# Altium PCB PCB1.pcbdoc (part 1 of 3)
Units mil, origin at the board's own origin, x right, y up, seen from the top; angles counter-clockwise.
Board outline 4471.89 x 4515.94 mil, 4 copper layers (Top Layer, Inner1, Inner2, Bottom Layer); 115 components, 147 nets, 637 pads, 517 vias.
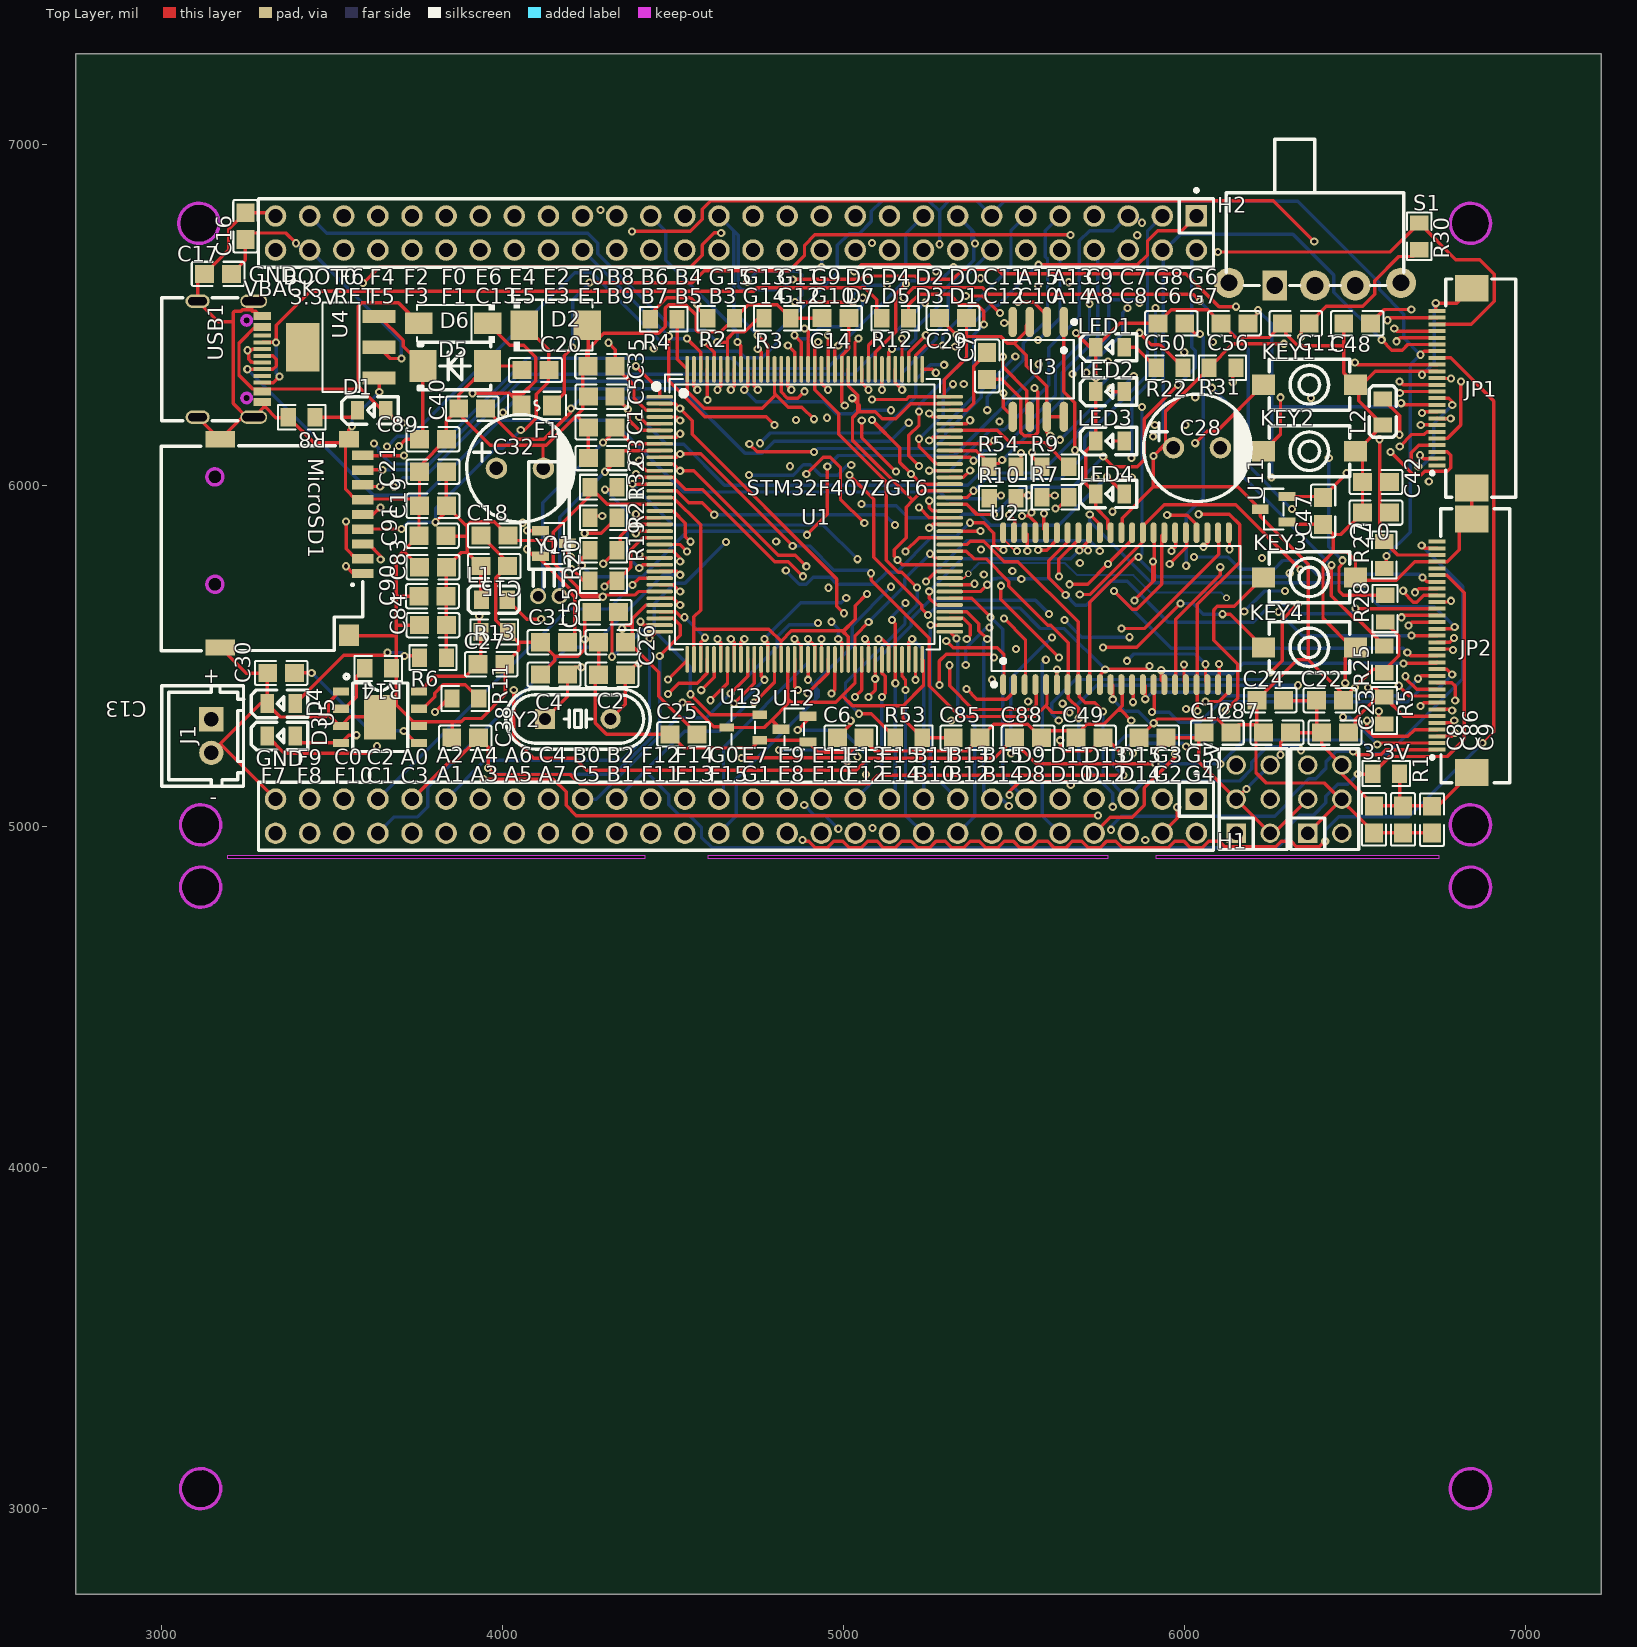
[diagram p0: Top Layer view]
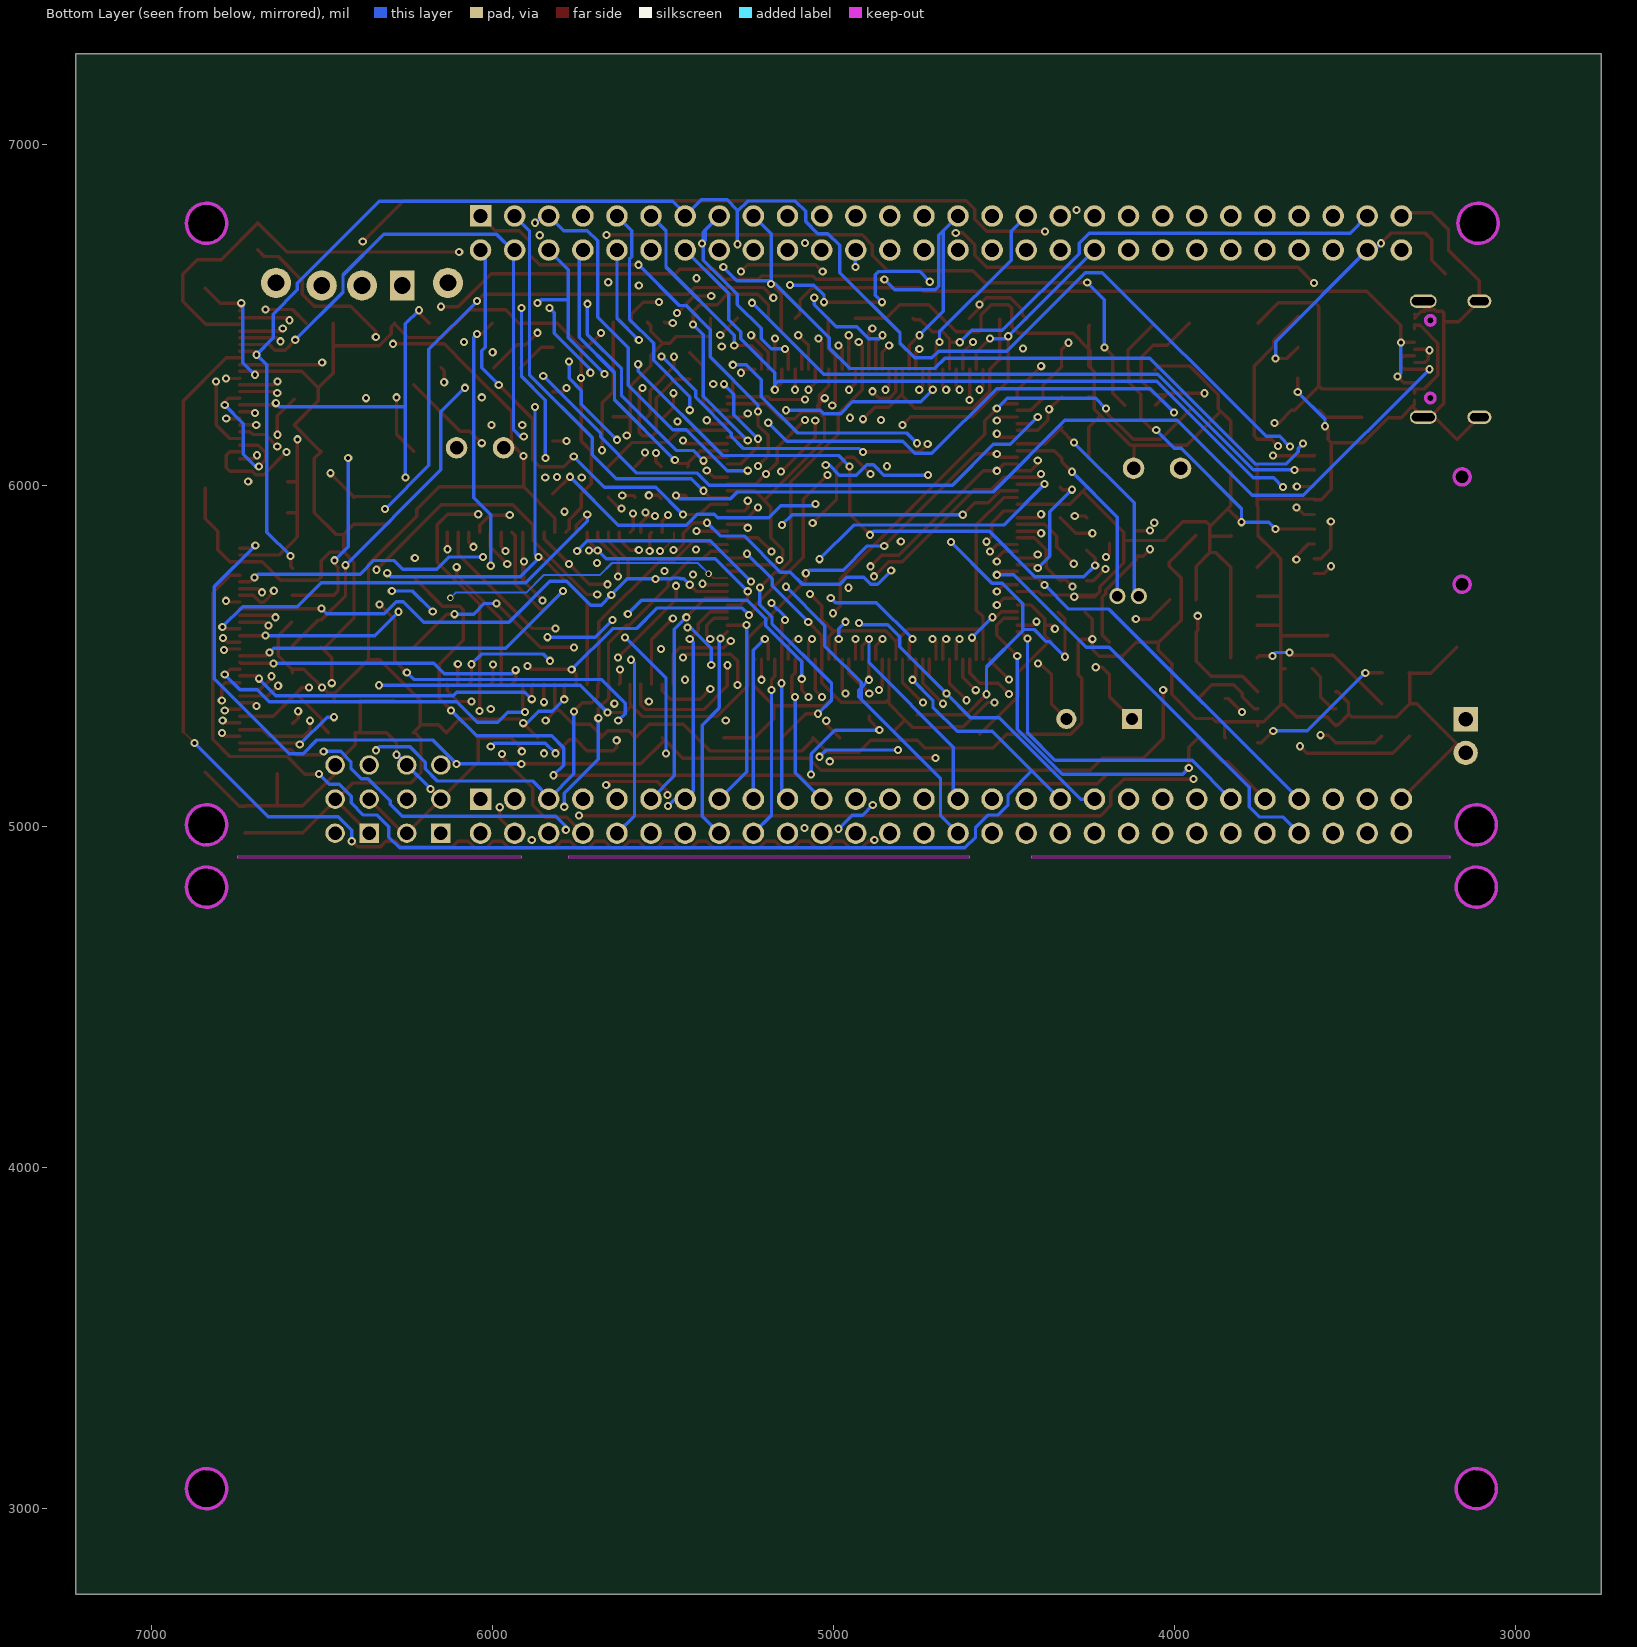
[diagram p1: Bottom Layer view, seen from below]
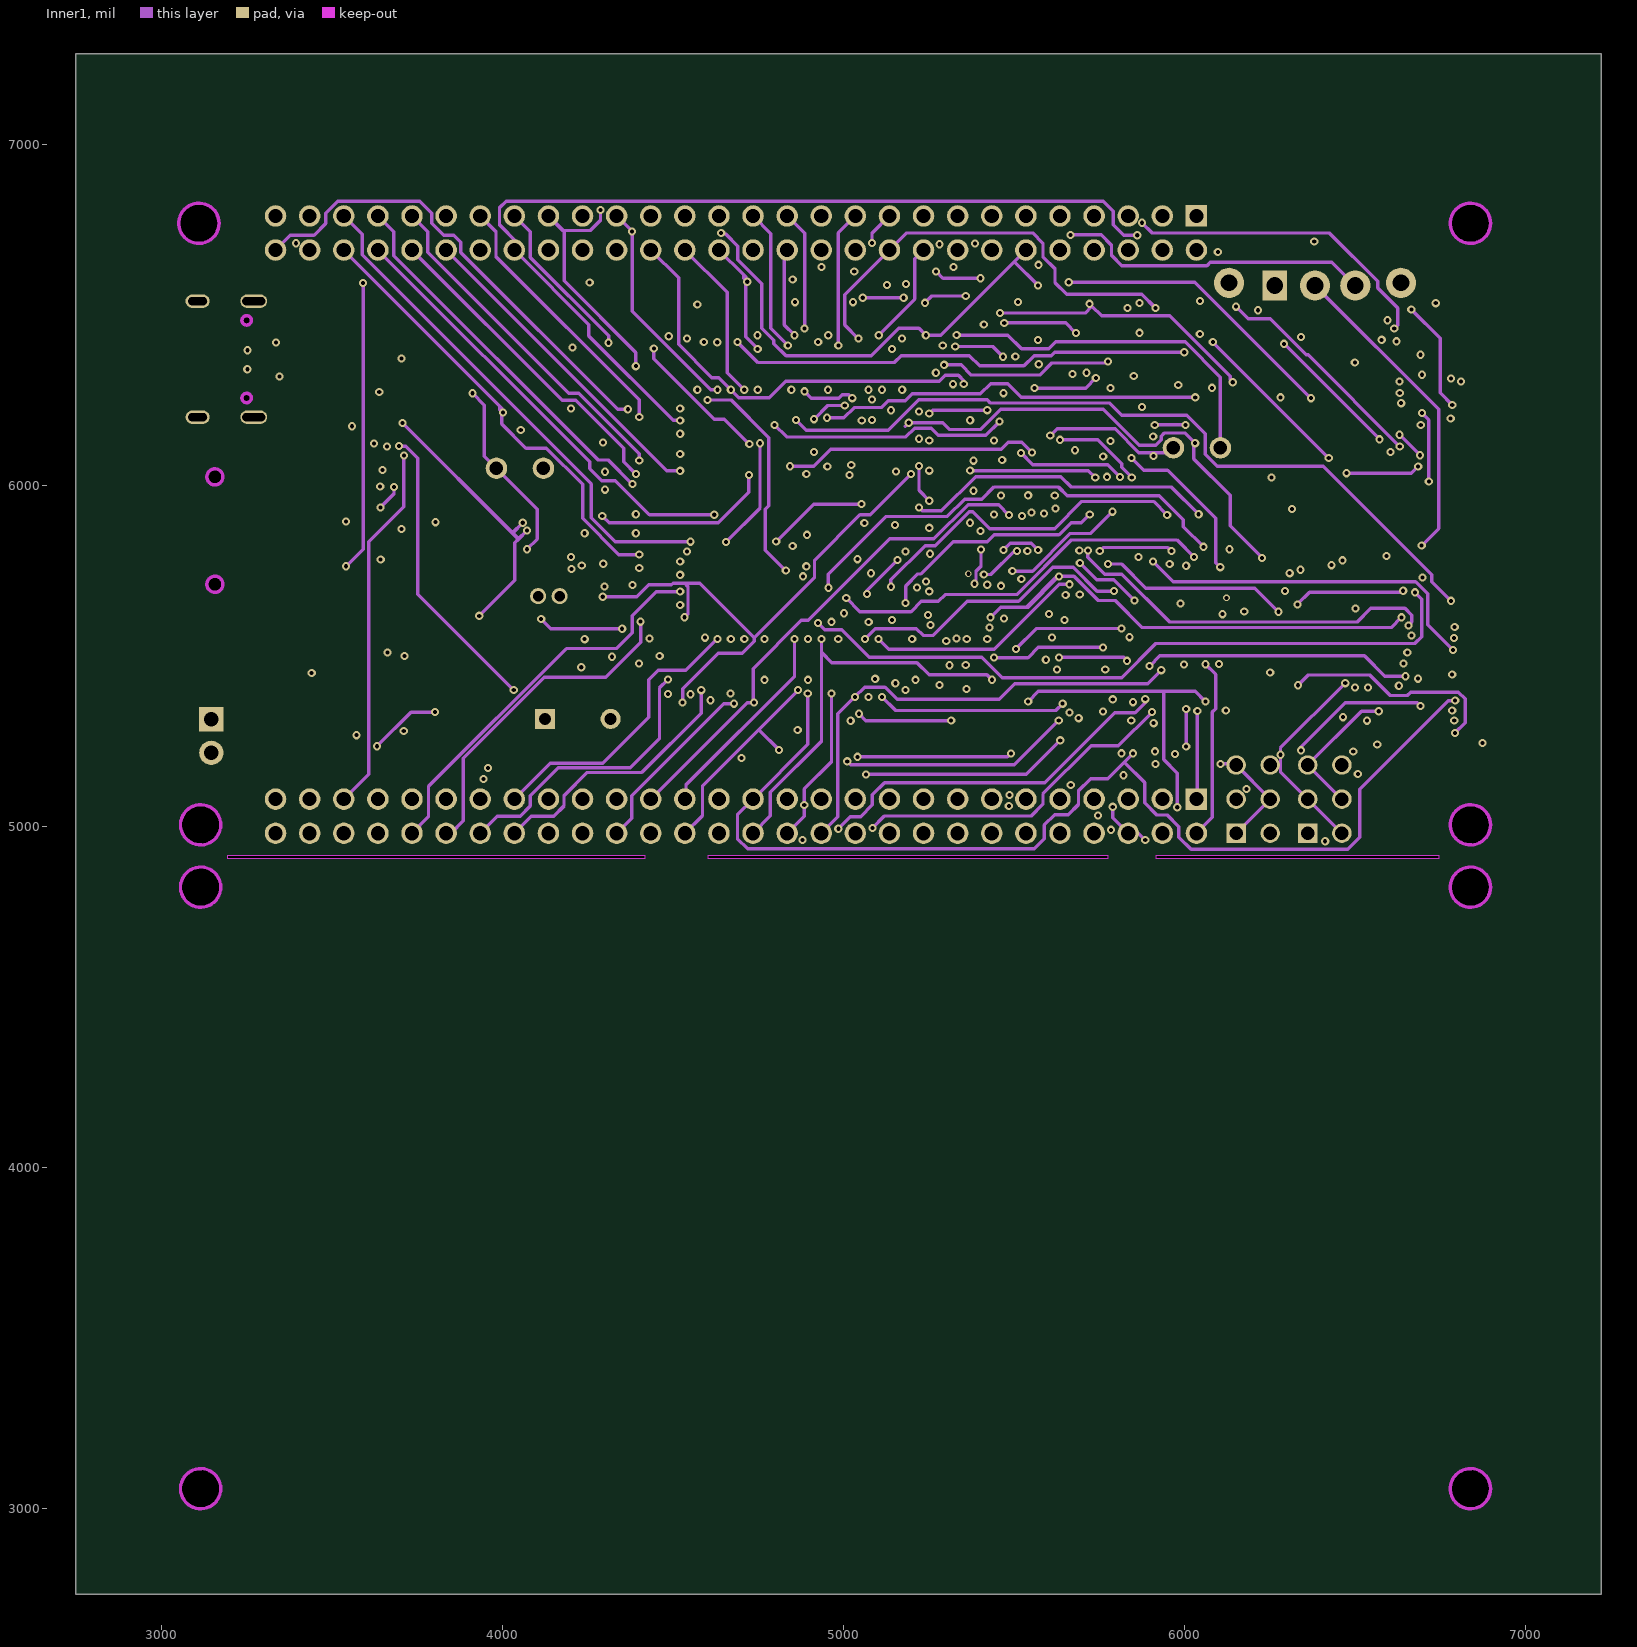
[diagram p2: Inner1]
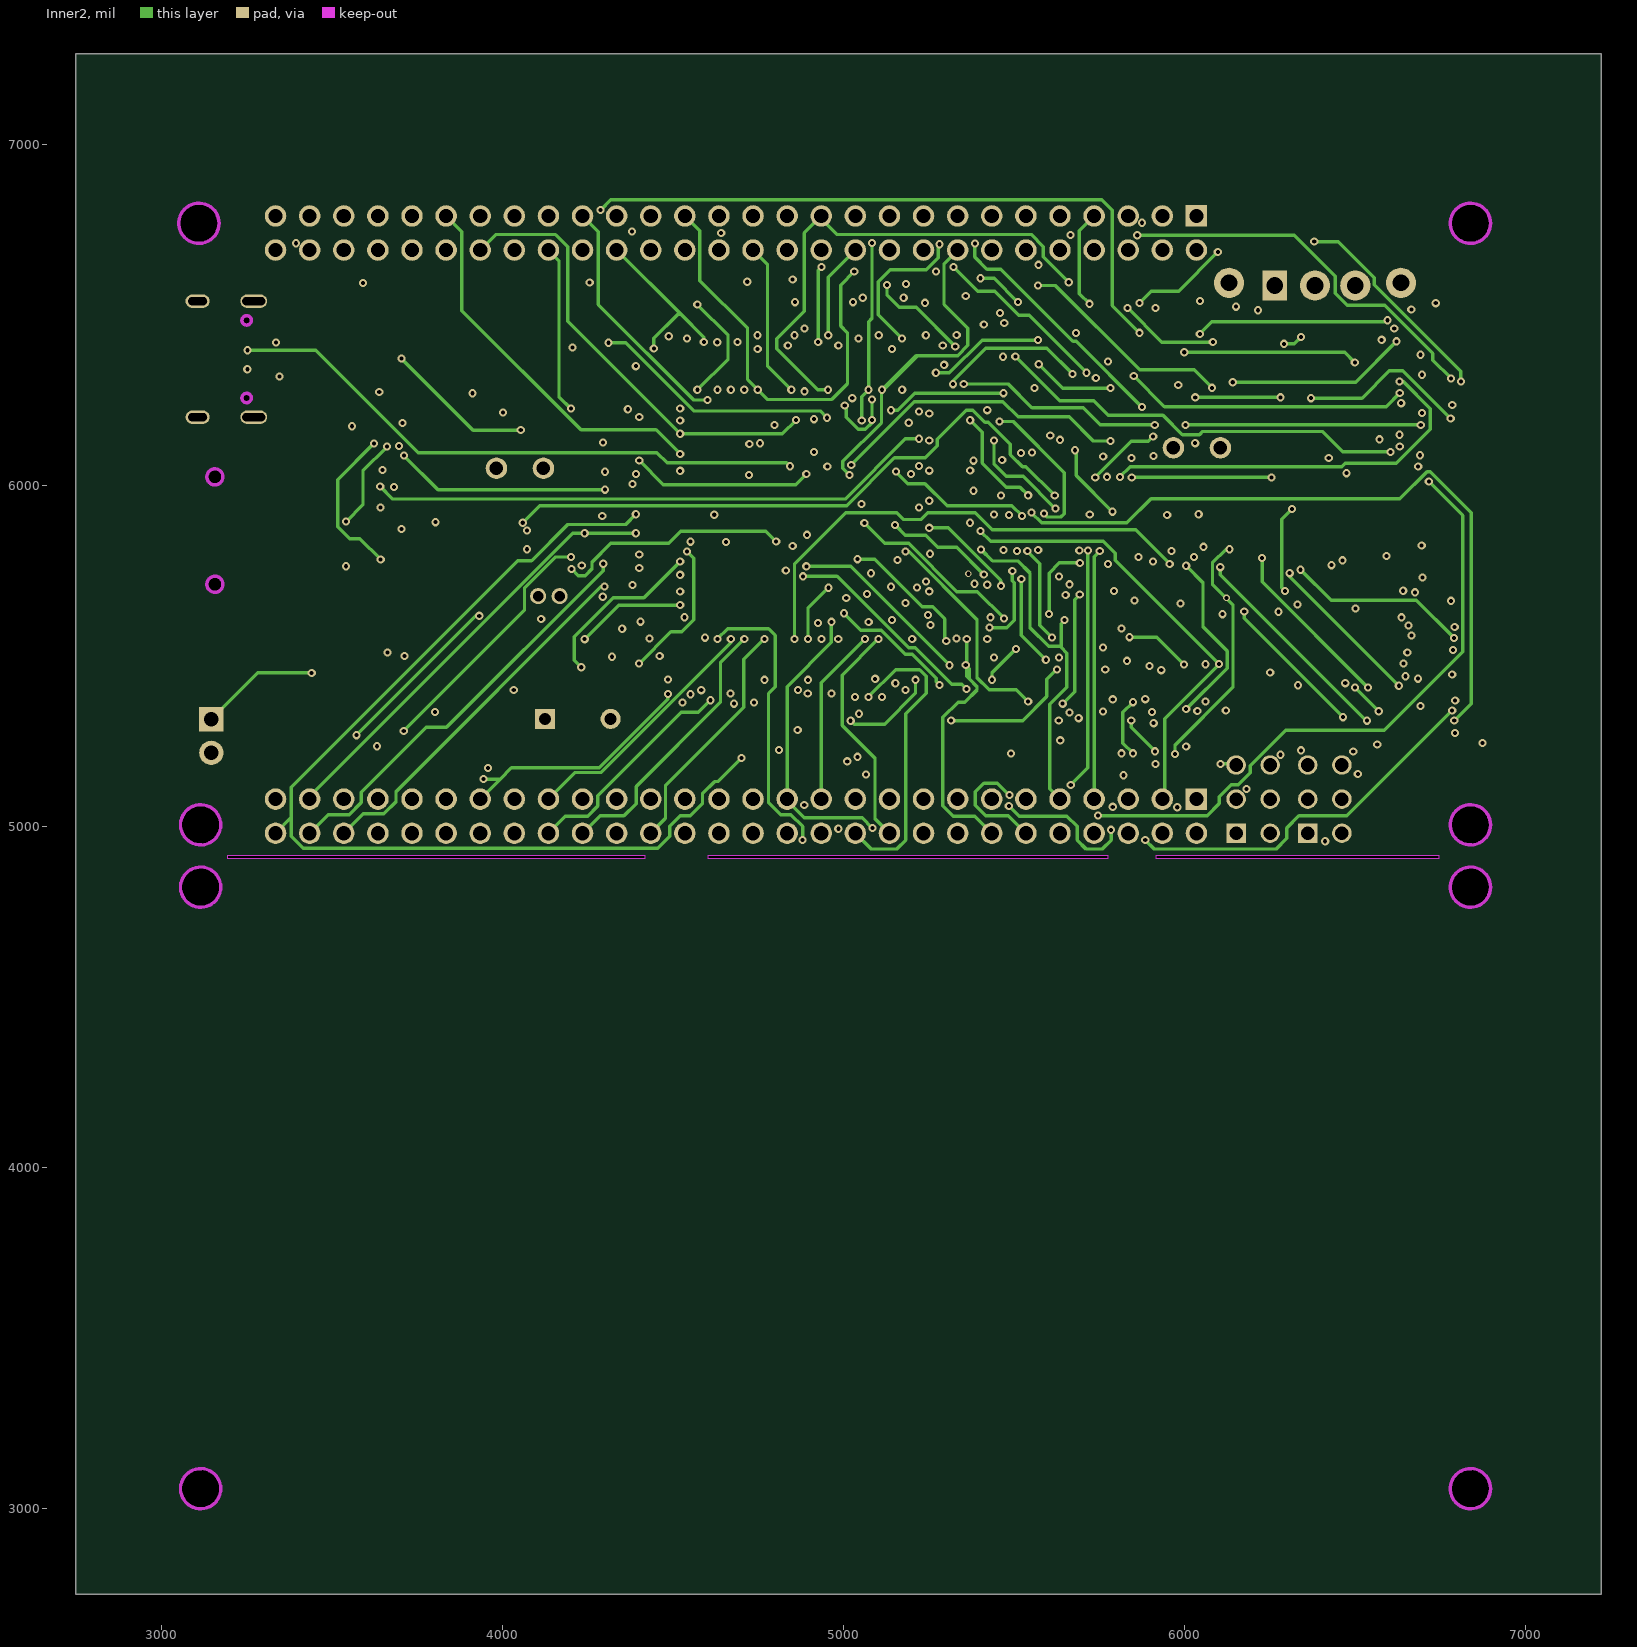
[diagram p3: Inner2]

## Layer stack, top to bottom
Top Layer: signal copper (thickness not stored)
Dielectric: dielectric 12.6, FR-4, Dk 4.8
Inner1: signal copper (thickness not stored)
Dielectric: dielectric 12.6, FR-4, Dk 4.8
Inner2: signal copper (thickness not stored)
Dielectric: dielectric 12.6, FR-4, Dk 4.8
Bottom Layer: signal copper (thickness not stored)

## Board outline
7221.89,2750 2750,2750 2750,7265.94 7221.89,7265.94
cut-out: 3169.69,6769.33 ccw(c3110.63,6768.85) 3051.58,6769.33 ccw(c3110.63,6769.81)
cut-out: 6898.03,6769.33 ccw(c6838.98,6769.33) 6779.92,6769.33 ccw(c6838.98,6769.33)
cut-out: 3174.69,5005.55 ccw(c3115.63,5005.07) 3056.58,5005.55 ccw(c3115.63,5006.03)
cut-out: 6898.03,5005.55 ccw(c6838.98,5005.55) 6779.92,5005.55 ccw(c6838.98,5005.55)
cut-out: 3174.69,3059.06 ccw(c3115.63,3058.58) 3056.58,3059.06 ccw(c3115.63,3059.54)
cut-out: 3174.69,4822.83 ccw(c3115.63,4822.35) 3056.58,4822.83 ccw(c3115.63,4823.31)
cut-out: 6898.03,4822.83 ccw(c6838.98,4822.83) 6779.92,4822.83 ccw(c6838.98,4822.83)
cut-out: 6898.03,3059.06 ccw(c6838.98,3059.06) 6779.92,3059.06 ccw(c6838.98,3059.06)
cut-out: 4418.76,4907.13 4418.76,4915 3193.92,4915 3193.92,4907.13
cut-out: 5776.71,4907.13 5776.71,4915 4601.87,4915 4601.87,4907.13
cut-out: 6747.82,4907.13 6747.82,4915 5916.67,4915 5916.67,4907.13

## Design rules (kind name [scope] priority, off if disabled: settings)
Clearance copperThickness1oz [All] p1: gap=7 ignorepadtopadclearanceinfootprint=FALSE except(4: Track-Track; 6: Track-SMDPad SMDPad-SMDPad Track-THPad SMDPad-THPad THPad-THPad Track-Via SMDPad-Via THPad-Via Via-Via Track-Fill SMDPad-Fill THPad-Fill Via-Fill Fill-Fill SMDPad-Region THPad-Region Via-Region Fill-Region Region-Region Track-Poly SMDPad-Poly THPad-Poly Via-Poly Fill-Poly Poly-Poly Track-Text SMDPad-Text THPad-Text Via-Text Fill-Text Region-Text Poly-Text Text-Text; 6.9: Track-Hole SMDPad-Hole THPad-Hole Via-Hole Fill-Hole Region-Hole Poly-Hole Text-Hole Sheet-Hole; 11.8: Track-Region Region-Poly Track-Sheet SMDPad-Sheet THPad-Sheet Via-Sheet Fill-Sheet Region-Sheet Poly-Sheet Text-Sheet)
Clearance copperThickness2oz [All] p1: gap=7 ignorepadtopadclearanceinfootprint=FALSE except(6: Track-SMDPad SMDPad-SMDPad Track-THPad SMDPad-THPad THPad-THPad Track-Via SMDPad-Via THPad-Via Via-Via Track-Fill SMDPad-Fill THPad-Fill Via-Fill Fill-Fill SMDPad-Region THPad-Region Via-Region Fill-Region Region-Region Track-Poly SMDPad-Poly THPad-Poly Via-Poly Fill-Poly Poly-Poly Track-Text SMDPad-Text THPad-Text Via-Text Fill-Text Region-Text Poly-Text Text-Text; 6.9: Track-Hole SMDPad-Hole THPad-Hole Via-Hole Fill-Hole Region-Hole Poly-Hole Text-Hole Sheet-Hole; 8: Track-Track; 11.8: Track-Region Region-Poly Track-Sheet SMDPad-Sheet THPad-Sheet Via-Sheet Fill-Sheet Region-Sheet Poly-Sheet Text-Sheet)
Clearance copperThicknessInner0.5oz [All] p1: gap=7 ignorepadtopadclearanceinfootprint=FALSE except(3.5: Track-Track; 6: Track-SMDPad SMDPad-SMDPad Track-THPad SMDPad-THPad THPad-THPad Track-Via SMDPad-Via THPad-Via Via-Via Track-Fill SMDPad-Fill THPad-Fill Via-Fill Fill-Fill SMDPad-Region THPad-Region Via-Region Fill-Region Region-Region Track-Poly SMDPad-Poly THPad-Poly Via-Poly Fill-Poly Poly-Poly Track-Text SMDPad-Text THPad-Text Via-Text Fill-Text Region-Text Poly-Text Text-Text; 6.9: Track-Hole SMDPad-Hole THPad-Hole Via-Hole Fill-Hole Region-Hole Poly-Hole Text-Hole Sheet-Hole; 11.8: Track-Region Region-Poly Track-Sheet SMDPad-Sheet THPad-Sheet Via-Sheet Fill-Sheet Region-Sheet Poly-Sheet Text-Sheet)
DiffPairsRouting differentialPair [All] p1: maxuncoupledlength=10 maxlimit=5.9843 mostfreqgap=5.9843 toplayer_minwidth=5 toplayer_prefwidth=10 toplayer_maxwidth=100 bottomlayer_minwidth=5 bottomlayer_prefwidth=10 bottomlayer_maxwidth=100 midlayer1_minwidth=5 midlayer1_prefwidth=10 midlayer1_maxwidth=100 midlayer2_minwidth=5 midlayer2_prefwidth=10 midlayer2_maxwidth=100
PasteMaskExpansion pasteMaskExpansion [All] p1:
PlaneConnect innerPlane [All] p1: planeconnectstyle=Relief reliefexpansion=20 reliefentries=4 reliefconductorwidth=10 reliefairgap=10
PolygonConnect copperRegion [All] p1: connectstyle=Relief reliefentries=4 reliefconductorwidth=10 polygonreliefangle="90 Angle" airgapwidth=10
RoutingVias viaSize [All] p1: viastyle="Through Hole" holewidth=12.0078 minholewidth=7.874 maxholewidth=248.0314 width=24.0158 minwidth=11.811 maxwidth=393.7008
SolderMaskExpansion solderMaskExpansion [All] p1: useseparateexpansions=TRUE expansion=2.0079 expansionbottom=2.0079
Width copperThickness1oz [All] p1: maxlimit=100 minlimit=4 preferedwidth=8
Width copperThickness2oz [All] p1: maxlimit=100 minlimit=8 preferedwidth=10
Width copperThickness0.5oz [All] p1: maxlimit=100 minlimit=4 preferedwidth=10

## Components (designator, comment, footprint, x,y, rotation, side; value= is the part's Value field where it differs from the comment)
3.3V "HX PZ2.54-3x2P ZZ" HDR-TH_6P-P2.54-V-M-R3-C2-S2.54_2 6411.89,5080.94 r0 top
5V "HX PZ2.54-3x2P ZZ" HDR-TH_6P-P2.54-V-M-R3-C2-S2.54_2 6201.89,5080.94 r0 top
C1 "CC0805JRNPO9BN220" C0805 4291.88,6170.91 r0 top
C2 "CC0805JRNPO9BN100" C0805 4321.88,5445.58 r0 top
C3 "CC0805JRNPO9BN220" C0805 4291.88,6080.77 r0 top
C4 "CC0805JRNPO9BN100" C0805 4151.89,5445.94 r0 top
C5 "CC0805KRX7R9BB104" C0805 4291.89,6260.94 r180 top
C6 "CC0805KKX7R9BB225" C0805 5021.89,5260.94 r0 top
C7 "CC0805KKX7R9BB225" C0805 5421.89,6350.94 r90 top
C8 "CC0805KKX5R8BB106_C89831" C0805 6556.26,5021.57 r90 top
C9 "CC0805KRX7R9BB104" C0805 6726.21,5020.65 r90 top
C10 "CC0805KRX7R9BB104" C0805 6561.89,5920.94 r0 top
C11 "CC0805KRX7R9BB104" C0805 6326.89,6475.94 r0 top
C12 "CC0805KRX7R9BB104" C0805 6096.89,5275.94 r0 top
C13 "CC0805KRX7R9BB104" C0805 5906.89,5260.94 r180 top
C14 "CC0805KRX7R9BB104" C0805 4976.89,6491.48 r0 top
C15 "CC0805KRX7R9BB104" C0805 3976.69,5764.07 r180 top
C16 "CC0805KRX7R9BB104" C0805 3246.89,6760.94 r270 top
C17 "CC0805KRX7R9BB104" C0805 3166.89,6620.94 r0 top
C18 "CC0805KRX7R9BB104" C0805 3976.99,5854.07 r0 top
C19 "CC0805KRX7R9BB104" C0805 3796.89,5940.94 r0 top
C20 "CC0805KRX7R9BB104" C0805 4097.58,6339.07 r0 top
C21 "CC0805KRX7R9BB104" C0805 3796.89,6040.94 r0 top
C22 "CL21A475KAQNNNE" C0805 6426.89,5370.94 r0 top
C23 "CC0805KRX7R9BB104" C0805 6441.89,5275.94 r0 top
C24 "CC0805KRX7R9BB104" C0805 6251.89,5370.94 r180 top
C25 "CL21A475KAQNNNE" C0805 4531.89,5270.94 r0 top
C26 "CC0805KRX7R9BB104" C0805 4321.89,5540.94 r0 top
C27 "CL21A106KAYNNNE_C15850" C0805 3967.94,5476.2 r0 top
C28 "ERE1VM221F12OT" CAP-TH_BD8.0-P3.50-D0.6-FD 6036.89,6110.94 r0 top
C29 "CC0805KRX7R9BB104" C0805 5321.89,6491.48 r0 top
C30 "CL21A106KAYNNNE_C15850" C0805 3351.89,5450.94 r0 top
C31 "CC0805KRX7R9BB104" C0805 4151.89,5540.94 r0 top
C32 "ERE1VM221F12OT" CAP-TH_BD8.0-P3.50-D0.6-FD 4051.89,6050.94 r0 top
C35 "CC0805KRX7R9BB104" C0805 4291.39,6350.28 r0 top
C38 "CC0805KRX7R9BB104" C0805 3891.39,5260.76 r0 top
C40 "CC0805KRX7R9BB104" C0805 3911.89,6225.94 r0 top
C42 "CC0805KRX7R9BB104" C0805 6561.89,6010.94 r180 top
C47 "CL21A106KAYNNNE_C15850" C0805 6406.89,5925.94 r90 top
C48 "CC0805KRX7R9BB104" C0805 6506.89,6475.94 r0 top
C49 "CL21A106KAYNNNE_C15850" C0805 5721.89,5260.94 r0 top
C50 "CC0805KRX7R9BB104" C0805 5961.89,6475.94 r0 top
C55 "CL21A106KAYNNNE_C15850" C0805 4301.77,5629.09 r0 top
C56 "CC0805KRX7R9BB104" C0805 6146.89,6475.94 r0 top
C83 "CL21B105KBFNNNE" C0805 3796.89,5760.94 r180 top
C84 "CL21B105KBFNNNE" C0805 3796.89,5590.94 r180 top
C85 "CL21B105KBFNNNE" C0805 5361.89,5260.94 r0 top
C86 "CL21A106KAYNNNE_C15850" C0805 6641.26,5021.57 r90 top
C87 "CC0805KRX7R9BB104" C0805 6271.89,5275.94 r0 top
C88 "CC0805KRX7R9BB104" C0805 5541.89,5260.94 r0 top
C89 "CC0805KRX7R9BB104" C0805 3796.89,6135.94 r0 top
C90 "CC0805KRX7R9BB104" C0805 3795.63,5675.94 r180 top
C91 "CC0805KRX7R9BB104" C0805 3795.26,5853.17 r180 top
D1 "NCD0805R1" LED0805-R-RD 3616.89,6220.94 r0 top
D2 "SMBJ3.3A_C5439946" SMB_L4.6-W3.6-LS5.3-RD 4156.89,6470.94 r0 top
D3 "NCD0805R1" LED0805-R-RD 3351.89,5265.94 r0 top
D4 "NCD0805R1" LED0805-R-RD 3351.89,5360.94 r0 top
D5 "SMBJ5.0A_C726811" SMB_L4.4-W3.6-LS5.3-RD 3861.89,6350.94 r0 top
D6 "={Manufacturer Part}" SMA_1N4007 3856.89,6475.94 r180 top
F1 "BSMD0805-010-33V" F0805 4101.43,6235.4 r0 top
H1 "X6521WV-2x28H-C60D30" HDR-TH_56P-2.54-V-M-R2-C28-S2.54 4685.43,5030.94 r180 top
H2 "X6521WV-2x28H-C60D30" HDR-TH_56P-2.54-V-M-R2-C28-S2.54 4685.43,6740.94 r180 top
J1 "ZX-XH2.54-2PZZ" CONN-TH_2P-P2.50_HX25003-2A 3146.89,5265.94 r270 top
JP1 "FPC-05F-24PH20" FPC-SMD_24P-P0.50_FPC-05F-24PH20 6791.89,6285.94 r90 top
JP2 "FPC-05F-32PH20" FPC-SMD_32P-P0.50_XUNPU_FPC-05F-32PH20 6791.89,5530.94 r90 top
KEY1 "UK-B0240-R-250-JZ" KEY-SMD_L6.0-W3.6-LS8.0 6366.89,6295.94 r0 top
KEY2 "UK-B0240-R-250-JZ" KEY-SMD_L6.0-W3.6-LS8.0 6366.89,6100.94 r0 top
KEY3 "UK-B0240-R-250-JZ" KEY-SMD_L6.0-W3.6-LS8.0 6366.89,5730.94 r0 top
KEY4 "UK-B0240-R-250-JZ" KEY-SMD_L6.0-W3.6-LS8.0 6366.89,5525.94 r0 top
L1 "ABPY00201209102Y00_C2847077" L0805 3976.89,5665.94 r0 top
L2 "BLM21PG221SN1D" L0805 6581.89,6215.94 r270 top
LED1 "NCD0805R1" LED0805-R-RD 5781.89,6405.94 r0 top
LED2 "NCD0805R1" LED0805-R-RD 5781.89,6275.94 r0 top
LED3 "NCD0805R1" LED0805-R-RD 5781.89,6130.94 r0 top
LED4 "NCD0805R1" LED0805-R-RD 5781.89,5975.94 r0 top
MicroSD1 "TF PUSH" TF-SMD_TF-PUSH 3381.89,5830.94 r270 top
Q1 "SI2301-ZE" SOT-23-3_L2.9-W1.3-P1.90-LS2.4-BR 4151.89,5830.94 r180 top
R1 "0805W8F1003T5E" R0805 6591.89,5155.94 r0 top
R2 "0805W8F0000T5E" R0805 4641.89,6490.94 r0 top
R3 "0805W8F1003T5E" R0805 4806.89,6490.94 r0 top
R4 "Res_0603" R0805 4473.29,6487.94 r0 top
R5 "0805W8F4701T5E" R0805 6586.89,5340.94 r270 top
R6 "Res_0603" R0805 3796.89,5495.94 r0 top
R7 "Res_0603" R0805 5621.89,5965.94 r0 top
R8 "Res_0603" R0805 3411.89,6200.94 r180 top
R9 "0805W8F220JT5E" R0805 5621.89,6055.94 r0 top
R10 "0805W8F220JT5E" R0805 5467.39,5963.53 r0 top
R11 "Res_0603" R0805 3891.89,5375.94 r0 top
R12 "Res_0603" R0805 5151.89,6490.94 r0 top
R13 "0805W8F1003T5E" R0805 3976.89,5570.94 r180 top
R14 "Res_0603" R0805 3636.3,5464.02 r180 top
R19 "Res_0603" R0805 4296.89,5810.94 r0 top
R20 "Res_0603" R0805 4296.89,5720.94 r0 top
R21 "Res_0603" R0805 4296.89,5905.94 r0 top
R22 "Res_0603" R0805 5956.89,6345.94 r0 top
R25 "0805W8F1002T5E_C17414" R0805 6586.89,5490.94 r90 top
R27 "0805W8F1002T5E_C17414" R0805 6586.26,5796.57 r270 top
R28 "0805W8F1002T5E_C17414" R0805 6588.47,5639.56 r90 top
R30 "0805W8F1002T5E_C17414" R0805 6689.1,6731.2 r90 top
R31 "0805W8F1002T5E_C17414" R0805 6111.89,6345.94 r0 top
R32 "0805W8F1002T5E_C17414" R0805 4296.89,5995.94 r0 top
R53 "0805W8F1002T5E_C17414" R0805 5191.89,5260.94 r0 top
R54 "0805W8F510JT5E" R0805 5466.89,6055.94 r0 top
S1 "船型开关601-10211BB" ss-12f23-g4 6366.89,6750.94 r180 top
U1 "STM32F407ZGT6" LQFP-144_L20.0-W20.0-P0.50-LS22.0-BL 4886.89,5915.94 r270 top
U2 "IS62WV51216BLL-55TLI" TSOP-44_L18.4-W10.2-P0.80-LS11.8-BL 5799.61,5639.41 r0 top
U3 "W25Q128JVSIQ_C113767" SOIC-8_L5.3-W5.3-P1.27-LS8.0-BL 5571.89,6340.94 r180 top
U4 "AMS1117-3.3_C347222" SOT-223-4_L6.5-W3.5-P2.30-LS7.0-BR 3526.89,6405.94 r0 top
U5 "TP4056_C725790" ESOP-8_L4.9-W3.9-P1.27-LS6.0-BL-EP 3641.89,5320.94 r270 top
U11 "XC6206P282MR" SOT-23-3_L2.9-W1.3-P1.90-LS2.4-BR 6261.89,5930.94 r0 top
U12 "XC6206P282MR" SOT-23-3_L2.9-W1.3-P1.90-LS2.4-BR 4856.89,5285.94 r0 top
U13 "XC6206P132MR" SOT-23-3_L2.9-W1.6-P1.90-LS2.8-BR 4706.89,5290.94 r0 top
USB1 "KH-TYPE-C-16P" usb-c-smd_kh-type-c-16p 3201.89,6370.94 r270 top
Y1 "X308032768KGB2SC" OSC-TH_BD3.1-P0.8-D0.3 4136.89,5675.94 r270 top
Y2 "TAXD12M2GLFBET2T" HC-49US_L11.5-W4.5-P4.88 4221.89,5315.94 r0 top

## Footprints (in the part's own frame and the unit in brackets; to place one, negate y for a bottom-side part, rotate by r counter-clockwise, add the part's x,y. Pads: shape width x height; smd on the part's side, far side on the other; paste and mask are expansions set on the pad)
C0805 [mm]
  rect 1.41x1.35 smd: 1(-1,0) 2(1,0)
  silkscreen extent -1.96,-0.9 1.96,0.9
CAP-TH_BD8.0-P3.50-D0.6-FD [mm]
  round 1.6 hole 1: 1(-1.75,0) 2(1.75,0)
  silkscreen extent -3.96,-4 4.04,4
CONN-TH_2P-P2.50_HX25003-2A [mm]
  rect 1.8x1.8 hole 1.1: 1(-1.25,0)
  round 1.8 hole 1.1: 2(1.25,0)
  silkscreen extent -3.75,-3.7 3.75,2.41
ESOP-8_L4.9-W3.9-P1.27-LS6.0-BL-EP [mm]
  rect 0.6x1.2 smd: 1(-1.905,-2.908) 2(-0.635,-2.908) 3(0.635,-2.908) 4(1.905,-2.908) 5(1.905,2.908) 6(0.635,2.908) 7(-0.635,2.908) 8(-1.905,2.908)
  rect 3.3x2.4 smd: 9(0,0)
  silkscreen extent -3.2,-2.67 2.55,2.05
F0805 [mm]
  rect 1.335x1.5 smd: 1(-1.142,0) 2(1.142,0)
  silkscreen extent -2.16,-1.02 2.16,1.02
FPC-SMD_24P-P0.50_FPC-05F-24PH20 [mm]
  rect 0.3x1.25 smd: 1(-5.75,1.288) 2(-5.25,1.288) 3(-4.75,1.288) 4(-4.25,1.288) 5(-3.75,1.288) 6(-3.25,1.288) 7(-2.75,1.288) 8(-2.25,1.288) 9(-1.75,1.288) 10(-1.25,1.288) 11(-0.75,1.288) 12(-0.25,1.288) 13(0.25,1.288) 14(0.75,1.288) 15(1.25,1.288) 16(1.75,1.288) 17(2.25,1.288) 18(2.75,1.288) 19(3.25,1.288) 20(3.75,1.288) 21(4.25,1.288) 22(4.75,1.288) 23(5.25,1.288) 24(5.75,1.288)
  rect 2x2.5 smd: 25(7.44,-1.288) 26(-7.44,-1.288)
  silkscreen extent -8.13,-4.57 8.13,1.78
FPC-SMD_32P-P0.50_XUNPU_FPC-05F-32PH20 [mm]
  rect 0.3x1.25 smd: 1(-7.75,1.288) 2(-7.25,1.288) 3(-6.75,1.288) 4(-6.25,1.288) 5(-5.75,1.288) 6(-5.25,1.288) 7(-4.75,1.288) 8(-4.25,1.288) 9(-3.75,1.288) 10(-3.25,1.288) 11(-2.75,1.288) 12(-2.25,1.288) 13(-1.75,1.288) 14(-1.25,1.288) 15(-0.75,1.288) 16(-0.25,1.288) 17(0.25,1.288) 18(0.75,1.288) 19(1.25,1.288) 20(1.75,1.288) 21(2.25,1.288) 22(2.75,1.288) 23(3.25,1.288) 24(3.75,1.288) 25(4.25,1.288) 26(4.75,1.288) 27(5.25,1.288) 28(5.75,1.288) 29(6.25,1.288) 30(6.75,1.288) 31(7.25,1.288) 32(7.75,1.288)
  rect 2x2.5 smd: 33(9.44,-1.288) 34(-9.44,-1.288)
  silkscreen extent -10.2,-4.11 10.2,1.78
HC-49US_L11.5-W4.5-P4.88 [mm]
  rect 1.5x1.5 hole 0.9: 1(-2.44,0)
  round 1.5 hole 0.9: 2(2.44,0)
  silkscreen extent -5.39,-2.25 5.39,2.25
HDR-TH_6P-P2.54-V-M-R3-C2-S2.54_2 [mm]
  rect 1.45x1.45 hole 1.02: 1(-1.27,-2.54)
  round 1.45 hole 1.02: 2(-1.27,0) 3(-1.27,2.54) 4(1.27,-2.54) 5(1.27,0) 6(1.27,2.54)
  silkscreen extent -2.54,-3.75 2.54,3.75
HDR-TH_56P-2.54-V-M-R2-C28-S2.54 [mm]
  rect 1.6x1.6 hole 1.05: 1(-34.29,-1.27)
  round 1.6 hole 1.05: 2(-34.29,1.27) 3(-31.75,-1.27) 4(-31.75,1.27) 5(-29.21,-1.27) 6(-29.21,1.27) 7(-26.67,-1.27) 8(-26.67,1.27) 9(-24.13,-1.27) 10(-24.13,1.27) 11(-21.59,-1.27) 12(-21.59,1.27) 13(-19.05,-1.27) 14(-19.05,1.27) 15(-16.51,-1.27) 16(-16.51,1.27) 17(-13.97,-1.27) 18(-13.97,1.27) 19(-11.43,-1.27) 20(-11.43,1.27) 21(-8.89,-1.27) 22(-8.89,1.27) 23(-6.35,-1.27) 24(-6.35,1.27) 25(-3.81,-1.27) 26(-3.81,1.27) 27(-1.27,-1.27) 28(-1.27,1.27) 29(1.27,-1.27) 30(1.27,1.27) 31(3.81,-1.27) 32(3.81,1.27) 33(6.35,-1.27) 34(6.35,1.27) 35(8.89,-1.27) 36(8.89,1.27) 37(11.43,-1.27) 38(11.43,1.27) 39(13.97,-1.27) 40(13.97,1.27) 41(16.51,-1.27) 42(16.51,1.27) 43(19.05,-1.27) 44(19.05,1.27) 45(21.59,-1.27) 46(21.59,1.27) 47(24.13,-1.27) 48(24.13,1.27) 49(26.67,-1.27) 50(26.67,1.27) 51(29.21,-1.27) 52(29.21,1.27) 53(31.75,-1.27) 54(31.75,1.27) 55(34.29,-1.27) 56(34.29,1.27)
  silkscreen extent -35.56,-3.3 35.56,2.54
KEY-SMD_L6.0-W3.6-LS8.0 [mm]
  rect 1.7x1.5 smd: 1(-3.431,0) 2(3.431,0)
  silkscreen extent -3.01,-1.9 2.99,1.9
L0805 [mil]
  rect 44.59x54.21 smd: 1(-38.04,0) 2(38.04,0)
  silkscreen extent -77,-40 73,40
LED0805-R-RD [mm]
  rect 1x1.4 smd: 1(1.05,0) 2(-1.05,0)
  silkscreen extent -2.22,-1.04 1.99,1.01
LQFP-144_L20.0-W20.0-P0.50-LS22.0-BL [mm]
  oval 0.28x2 smd: 1(-8.75,-10.8) 2(-8.25,-10.8) 3(-7.75,-10.8) 4(-7.25,-10.8) 5(-6.75,-10.8) 6(-6.25,-10.8) 7(-5.75,-10.8) 8(-5.25,-10.8) 9(-4.75,-10.8) 10(-4.25,-10.8) 11(-3.75,-10.8) 12(-3.25,-10.8) 13(-2.75,-10.8) 14(-2.25,-10.8) 15(-1.75,-10.8) 16(-1.25,-10.8) 17(-0.75,-10.8) 18(-0.25,-10.8) 19(0.25,-10.8) 20(0.75,-10.8) 21(1.25,-10.8) 22(1.75,-10.8) 23(2.25,-10.8) 24(2.75,-10.8) 25(3.25,-10.8) 26(3.75,-10.8) 27(4.25,-10.8) 28(4.75,-10.8) 29(5.25,-10.8) 30(5.75,-10.8) 31(6.25,-10.8) 32(6.75,-10.8) 33(7.25,-10.8) 34(7.75,-10.8) 35(8.25,-10.8) 36(8.75,-10.8) 73(8.75,10.8) 74(8.25,10.8) 75(7.75,10.8) 76(7.25,10.8) 77(6.75,10.8) 78(6.25,10.8) 79(5.75,10.8) 80(5.25,10.8) 81(4.75,10.8) 82(4.25,10.8) 83(3.75,10.8) 84(3.25,10.8) 85(2.75,10.8) 86(2.25,10.8) 87(1.75,10.8) 88(1.25,10.8) 89(0.75,10.8) 90(0.25,10.8) 91(-0.25,10.8) 92(-0.75,10.8) 93(-1.25,10.8) 94(-1.75,10.8) 95(-2.25,10.8) 96(-2.75,10.8) 97(-3.25,10.8) 98(-3.75,10.8) 99(-4.25,10.8) 100(-4.75,10.8) 101(-5.25,10.8) 102(-5.75,10.8) 103(-6.25,10.8) 104(-6.75,10.8) 105(-7.25,10.8) 106(-7.75,10.8) 107(-8.25,10.8) 108(-8.75,10.8)
  oval 2x0.28 smd: 37(10.8,-8.75) 38(10.8,-8.25) 39(10.8,-7.75) 40(10.8,-7.25) 41(10.8,-6.75) 42(10.8,-6.25) 43(10.8,-5.75) 44(10.8,-5.25) 45(10.8,-4.75) 46(10.8,-4.25) 47(10.8,-3.75) 48(10.8,-3.25) 49(10.8,-2.75) 50(10.8,-2.25) 51(10.8,-1.75) 52(10.8,-1.25) 53(10.8,-0.75) 54(10.8,-0.25) 55(10.8,0.25) 56(10.8,0.75) 57(10.8,1.25) 58(10.8,1.75) 59(10.8,2.25) 60(10.8,2.75) 61(10.8,3.25) 62(10.8,3.75) 63(10.8,4.25) 64(10.8,4.75) 65(10.8,5.25) 66(10.8,5.75) 67(10.8,6.25) 68(10.8,6.75) 69(10.8,7.25) 70(10.8,7.75) 71(10.8,8.25) 72(10.8,8.75) 109(-10.8,8.75) 110(-10.8,8.25) 111(-10.8,7.75) 112(-10.8,7.25) 113(-10.8,6.75) 114(-10.8,6.25) 115(-10.8,5.75) 116(-10.8,5.25) 117(-10.8,4.75) 118(-10.8,4.25) 119(-10.8,3.75) 120(-10.8,3.25) 121(-10.8,2.75) 122(-10.8,2.25) 123(-10.8,1.75) 124(-10.8,1.25) 125(-10.8,0.75) 126(-10.8,0.25) 127(-10.8,-0.25) 128(-10.8,-0.75) 129(-10.8,-1.25) 130(-10.8,-1.75) 131(-10.8,-2.25) 132(-10.8,-2.75) 133(-10.8,-3.25) 134(-10.8,-3.75) 135(-10.8,-4.25) 136(-10.8,-4.75) 137(-10.8,-5.25) 138(-10.8,-5.75) 139(-10.8,-6.25) 140(-10.8,-6.75) 141(-10.8,-7.25) 142(-10.8,-7.75) 143(-10.8,-8.25) 144(-10.8,-8.75)
  silkscreen extent -10.41,-11.25 10.08,10.08
OSC-TH_BD3.1-P0.8-D0.3 [mm]
  round 1.2 hole 0.8: 1(0,0.8) 2(0,-0.8)
  silkscreen extent -10,-1.5 -0.7,1.5
R0805 [mm]
  rect 1.133x1.377 smd: 1(-1,0) 2(1,0)
  silkscreen extent -1.76,-0.92 1.76,0.92
SMA_1N4007 [mil]
  rect 80.57x63.78 smd: 1(-101,0) 2(101,0)
  silkscreen extent -121,-57 106,57
SMB_L4.4-W3.6-LS5.3-RD [mm]
  rect 2x2.4 smd: 1(-2.4,0) 2(2.4,0)
  silkscreen extent -2.76,-1.78 2.67,1.78
SMB_L4.6-W3.6-LS5.3-RD [mil]
  rect 80.61x86.31 smd: 1(-92.94,0) 2(92.94,0)
  silkscreen extent -123,-77 108,77
SOIC-8_L5.3-W5.3-P1.27-LS8.0-BL [mm]
  oval 0.63x2.25 smd: 1(-1.905,-3.53) 2(-0.635,-3.53) 3(0.635,-3.53) 4(1.905,-3.53) 5(1.905,3.53) 6(0.635,3.53) 7(-0.635,3.53) 8(-1.905,3.53)
  silkscreen extent -2.82,-3.68 2.64,2.18
SOT-23-3_L2.9-W1.3-P1.90-LS2.4-BR [mm]
  rect 1.25x0.7 smd: 1(1,-0.95) 2(1,0.95) 3(-1,0)
  silkscreen extent -0.73,-1.53 0.73,1.53
SOT-23-3_L2.9-W1.6-P1.90-LS2.8-BR [mm]
  rect 1.07x0.6 smd: 1(1.235,-0.95) 2(1.235,0.95) 3(-1.235,0)
  silkscreen extent -0.88,-1.54 0.88,1.54
SOT-223-4_L6.5-W3.5-P2.30-LS7.0-BR [mm]
  rect 2.47x0.98 smd: 1(2.835,-2.3) 2(2.835,0) 3(2.835,2.3)
  rect 2.47x3.6 smd: 4(-2.835,0)
  silkscreen extent -1.37,-3.33 1.37,3.33
ss-12f23-g4 [mm]
  rect 1.8x2.25 hole 1.25: 1(2.587,4.169)
  round 2.25 hole 1.25: 2(-0.413,4.169) 3(-3.413,4.169) 4(-6.813,3.969) 5(5.987,3.969)
  silkscreen extent -7.02,-6.73 6.19,4.17
TF-SMD_TF-PUSH [mm]
  rect 0.7x1.6 smd: 1(2.25,5.3) 2(1.15,5.3) 3(0.05,5.3) 4(-1.05,5.3) 5(-2.15,5.3) 6(-3.25,5.3) 7(-4.35,5.3) 8(-5.45,5.3) CD(-6.55,5.3)
  rect 1.2x1.5 smd: 10(-7.75,4.3)
  rect 1.2x2.2 smd: 11(-7.75,-5.3) 12(7.75,-5.3)
  rect 1.6x1.5 smd: 13(6.85,4.3)
  Multi-Layer board cut-out: -4.95,-5.1 -5.248,-5.182 -5.466,-5.401 -5.546,-5.7 -5.466,-5.999 -5.248,-6.218 -4.95,-6.3 -4.95,-6.3 -4.651,-6.218 -4.434,-5.999 -4.354,-5.7 -4.434,-5.401 -4.652,-5.182 -4.95,-5.1
  Multi-Layer board cut-out: 3.05,-5.1 2.752,-5.182 2.534,-5.401 2.454,-5.7 2.534,-5.999 2.752,-6.218 3.05,-6.3 3.05,-6.3 3.348,-6.218 3.566,-5.999 3.646,-5.7 3.566,-5.401 3.348,-5.182 3.05,-5.1
  Multi-Layer keep-out circle w0.254: c-4.95,-5.7 r0.6
  Multi-Layer keep-out circle w0.254: c3.05,-5.7 r0.6
  silkscreen extent -7.26,-9.7 8,5.3
TSOP-44_L18.4-W10.2-P0.80-LS11.8-BL [mm]
  oval 0.448x1.551 smd: 1(-8.4,-5.656) 2(-7.6,-5.656) 3(-6.8,-5.656) 4(-6,-5.656) 5(-5.2,-5.656) 6(-4.4,-5.656) 7(-3.6,-5.656) 8(-2.8,-5.656) 9(-2,-5.656) 10(-1.2,-5.656) 11(-0.4,-5.656) 12(0.4,-5.656) 13(1.2,-5.656) 14(2,-5.656) 15(2.8,-5.656) 16(3.6,-5.656) 17(4.4,-5.656) 18(5.2,-5.656) 19(6,-5.656) 20(6.8,-5.656) 21(7.6,-5.656) 22(8.4,-5.656) 23(8.4,5.656) 24(7.6,5.656) 25(6.8,5.656) 26(6,5.656) 27(5.2,5.656) 28(4.4,5.656) 29(3.6,5.656) 30(2.8,5.656) 31(2,5.656) 32(1.2,5.656) 33(0.4,5.656) 34(-0.4,5.656) 35(-1.2,5.656) 36(-2,5.656) 37(-2.8,5.656) 38(-3.6,5.656) 39(-4.4,5.656) 40(-5.2,5.656) 41(-6,5.656) 42(-6.8,5.656) 43(-7.6,5.656) 44(-8.4,5.656)
  silkscreen extent -9.28,-5.81 9.28,4.65
usb-c-smd_kh-type-c-16p [mm]
  oval 1x2 hole 0.6 slot 1.7 at 90 deg: 1(-4.32,1.765) 2(4.32,1.765)
  oval 1x1.8 hole 0.6 slot 1.4 at 90 deg: 3(-4.32,-2.415) 4(4.32,-2.415)
  rect 0.3x1.3 smd: A1(-3.35,2.415) A4(-2.55,2.415) A5(-1.25,2.415) A6(-0.25,2.415) A7(0.25,2.415) A8(1.25,2.415) A9(2.55,2.415) A12(3.35,2.415) B1(3.05,2.415) B4(2.25,2.415) B5(1.75,2.415) B6(0.75,2.415) B7(-0.75,2.415) B8(-1.75,2.415) B9(-2.25,2.415) B12(-3.05,2.415)
  Multi-Layer board cut-out: -2.89,1.585 -3.042,1.55 -3.164,1.453 -3.231,1.313 -3.231,1.157 -3.164,1.017 -3.042,0.92 -2.89,0.885 -2.89,0.885 -2.738,0.92 -2.616,1.017 -2.549,1.157 -2.549,1.313 -2.616,1.453 -2.738,1.55 -2.89,1.585
  Multi-Layer board cut-out: 2.89,1.585 2.738,1.55 2.616,1.453 2.549,1.313 2.549,1.157 2.616,1.017 2.738,0.92 2.89,0.885 2.89,0.885 3.042,0.92 3.164,1.017 3.231,1.157 3.231,1.313 3.164,1.453 3.042,1.55 2.89,1.585
  Multi-Layer keep-out circle w0.254: c-2.89,1.235 r0.35
  Multi-Layer keep-out circle w0.254: c2.89,1.235 r0.35
  silkscreen extent -4.57,-5.08 4.57,0.57

## Via types
v1: diameter 24.02, hole 12.01, Top Layer to Bottom Layer, 515 vias
v2: diameter 19.68, hole 11.81, Top Layer to Bottom Layer, 2 vias

## Nets (pads, with @x,y where several pads share a name; then routed paths per layer and width w, separated by ;. In a path a pad name is that pad's centre, name@x,y a point inside that pad or via, vN(x,y) a via of type N, cw(c..) or ccw(c..) an arc to the next point about the centre after c; other vN are vias at no path point)
1.3V: C55.2 C56.2 JP1.10 U13.2 | length 4633.8
  Top Layer w10: v1(4321.89,5498.34) 4321.89,5609.84 C55.2@4341.14,5629.09 ; v1(4551.89,5388.34) 4611.89,5328.34 U13.2@4755.52,5328.34 ; C56.2@6186.26,6475.94 6215.82,6505.51 v1(6215.82,6514.41) ; v1(6635.82,6241.91) 6641,6236.73 JP1.10@6741.2,6236.73
  Inner1 w10: v1(4655.82,5834.41) 4755.82,5934.41 v1(4755.82,6124.41) ; v1(5295.82,6354.41) 5345.82,6354.41 5375.82,6324.41 5575.82,6324.41 5611.18,6359.77 5771.18,6359.77 v1(5775.82,6364.41) ; v1(5635.82,6134.41) 5745.82,6134.41 5816.53,6063.7 5816.53,6053.7 v1(5845.82,6024.41)
  Inner2 w10: v1(5845.82,6024.41) v1(6255.82,6024.41)
  Bottom Layer w10: v1(4321.89,5498.34) 4366.53,5542.99 4376.53,5542.99 4411.89,5578.34 4441.89,5578.34 4445.82,5574.41 ; v1(4551.89,5388.34) 4551.89,5468.34 4445.82,5574.41 ; v1(4655.82,5834.41) 4535.82,5714.41 4505.82,5714.41 4445.82,5654.41 4445.82,5574.41 ; v1(4755.82,6124.41) 4785.82,6154.41 5105.82,6154.41 5211.89,6260.48 5211.89,6310.48 5255.82,6354.41 v1(5295.82,6354.41) ; v1(5635.82,6134.41) 5740.47,6239.06 5740.47,6279.06 5775.82,6314.41 v1(5775.82,6364.41) ; v1(6215.82,6514.41) 6255.82,6474.41 6255.82,6231.91 ; v1(6255.82,6024.41) 6255.82,6231.91 ; v1(6635.82,6241.91) 6625.82,6231.91 6255.82,6231.91
2.8V: C47.2 C48.2 JP1.4 JP1.11 U11.2 | length 1308.8
  Top Layer w10: U11.2@6301.26,5968.34 6403.86,5968.34 C47.2@6405.63,5966.58 ; C47.2@6406.89,5965.31 C47.2@6405.63,5966.58 ; v1(6475.63,6036.58) C47.2@6405.63,5966.58 ; C48.2@6546.26,6475.94 6586.89,6516.58 v1(6665.63,6516.58) ; v1(6685.63,6056.58) 6665.63,6076.58 6665.63,6096.58 6687.67,6118.62 JP1.4@6741.2,6118.62 ; JP1.11@6741.2,6256.41 6775.8,6256.41 6785.63,6246.58 v1(6785.63,6236.58)
  Inner1 w10: v1(6475.63,6036.58) 6665.63,6036.58 v1(6685.63,6056.58) ; v1(6665.63,6516.58) 6750.27,6431.93 6750.27,6271.93 v1(6785.63,6236.58)
  Bottom Layer w10: v1(6685.63,6056.58) 6695.63,6056.58 6730.98,6091.93 6730.98,6181.93 v1(6785.63,6236.58)
3.3V: 3.3V.1 3.3V.3 3.3V.5 C8.1 C9.1 C10.2 C11.2 C12.2 C13.2 C14.2 C15.2 C16.2 C17.2 C18.2 C19.2 C20.2 C21.2 C22.2 C24.2 C28.1 C29.2 C42.1 C83.1 C84.1 C85.1 C86.1 C87.1 C90.1 C91.1 D2.1 H2.54 JP2.30 L1.1 MicroSD1.4 R4.2 R5.2 R6.2 R25.1 R27.1 R28.1 R30.1 R31.1 R32.1 R53.2 U1.17 U1.30 U1.33 U1.39 U1.52 U1.62 U1.72 U1.84 U1.95 U1.108 U1.121 U1.131 U1.144 U2.11 U2.33 U3.3 U3.7 U3.8 U4.2 U11.3 U12.3 U13.3 | length 17178.1
  Top Layer w9.92: R32.1@4257.52,5995.94 R32.1@4269.4,5984.06 ; v1(4294.67,5674.3) 4234.67,5674.3 4229.4,5679.56 ; U1.33@4461.69,5630.51 4508.45,5630.51 4524.67,5614.3 v1(4534.67,5614.3) ; U1.30@4461.69,5689.56 4399.4,5689.56 4389.4,5679.56 4229.4,5679.56 ; U1.17@4461.69,5945.47 4307.99,5945.47 R32.1@4269.4,5984.06 ; R4.2@4512.66,6487.94 4512.66,6370.89 U1.144@4542.4,6341.14 4542.4,6276.83 4592.02,6227.22 4762.02,6227.22 4802.02,6267.22 ; v1(4528.92,5364.3) 4548.92,5364.3 4619.63,5293.59 4655.62,5293.59 U13.3@4658.27,5290.94 4768.27,5290.94 4791.07,5313.75 4837.68,5360.36 4837.68,5375.24 ; U1.39@4581.77,5490.74 4581.77,5541.41 v1(4594.67,5554.3) ; U1.131@4798.31,6341.14 4798.31,6270.92 4802.02,6267.22 ; U1.52@4837.68,5490.74 4837.68,5375.24 ; v1(4914.21,6195.03) 4878.85,6230.38 4838.85,6230.38 4802.02,6267.22 ; v1(5004.21,6235.03) 4995.16,6244.07 U1.121@4995.16,6341.14 4995.16,6381.14 5016.26,6402.24 C14.2@5016.26,6491.48 ; v1(5074.53,5600.43) 5034.53,5560.43 U1.62@5034.53,5490.74 5034.53,5422.09 4996.97,5384.54 ; v1(5084.21,6192.55) 5165.32,6111.43 5165.32,6067.9 v1(5198.92,6034.3) 5228.7,6004.52 U1.95@5312.09,6004.52 ; v1(5084.21,6252.55) 5184.21,6252.55 5192.09,6260.43 U1.108@5296.27,6260.43 ; R53.2@5231.26,5260.94 5175.17,5317.03 5175.17,5354.54 ; U1.72@5231.38,5490.74 5235.17,5486.95 5235.17,5414.54 5175.17,5354.54 ; v1(5254.53,5800.43) 5266.97,5787.99 U1.84@5312.09,5787.99 ; U1.108@5312.09,6260.43 U1.108@5296.27,6260.43 ; C29.2@5361.26,6491.48 5361.26,6437.44 5361.26,6375.43 5296.27,6310.43 U1.108@5296.27,6260.43 ; 4229.4,5679.56 4219.4,5689.56 4219.4,5704.06 4149.4,5774.06 4149.4,5839.26 4149.4,5864.06 R32.1@4269.4,5984.06 ; 4837.68,5375.24 4847.68,5365.24 4977.68,5365.24 4996.97,5384.54 ; 4996.97,5384.54 5026.97,5354.54 5175.17,5354.54
  Top Layer w10: C17.2@3206.26,6620.94 3246.89,6661.57 C16.2@3246.89,6721.57 3266.26,6740.94 3365.43,6740.94 v1(3395.43,6710.94) ; MicroSD1.4@3590.55,5872.28 3591.23,5872.96 v1(3704.24,5872.96) ; U4.2@3638.5,6405.94 3671.48,6372.96 v1(3704.24,6372.96) ; v1(3804.24,5892.96) C19.2@3844.24,5932.96 ; C91.1@3834.63,5853.17 3836.23,5851.57 3897.32,5851.57 ; C90.1@3835,5675.94 C90.1@3836.26,5677.2 ; R6.2@3836.26,5495.94 C84.1@3836.26,5590.94 C90.1@3836.26,5677.2 ; C21.2@3836.26,6040.94 C19.2@3836.26,5940.94 C19.2@3844.24,5932.96 ; L1.1@3938.85,5665.94 3937.32,5667.48 C15.2@3937.32,5764.07 3897.32,5804.07 ; v1(4054.24,6162.96) 4064.24,6162.96 4099.6,6198.32 4099.6,6268.32 4134.95,6303.67 4134.95,6337.07 C20.2@4136.95,6339.07 4136.95,6397.94 D2.1@4063.95,6470.94 ; 4149.4,5839.26 4031.17,5839.26 C18.2@4016.36,5854.07 3976.36,5894.07 3907.32,5894.07 3898.48,5885.23 ; 4791.07,5313.75 4791.07,5312.4 U12.3@4817.52,5285.94 ; R53.2@5231.26,5260.94 C85.1@5322.52,5260.94 ; 5361.26,6437.44 5461.26,6437.44 5481.26,6417.44 5501.26,6417.44 ; U3.3@5546.89,6479.92 5536.62,6469.65 5536.62,6452.79 5501.26,6417.44 ; v1(5606.89,6146.81) 5596.89,6156.81 U3.7@5596.89,6201.96 ; U3.8@5646.89,6201.96 U3.7@5596.89,6201.96 ; U2.11@5786.14,5418.28 5790.15,5414.28 v1(5790.15,5373.57) ; U2.33@5817.64,5863.6 5817.64,5905.06 5909.39,5996.81 ; C13.2@5867.52,5260.94 v1(5910.15,5303.57) 5922.52,5315.94 6096.26,5315.94 C12.2@6136.26,5275.94 6158.76,5298.44 C87.1@6212.52,5298.44 ; C87.1@6232.52,5275.94 C87.1@6230.2,5278.27 ; v1(6292.52,6415.94) 6142.52,6415.94 R31.1@6072.52,6345.94 5944.75,6218.17 5944.75,6122.16 v1(5909.39,6086.81) 5909.39,5996.81 ; v1(6342.52,6435.94) 6342.52,6452.2 C11.2@6366.26,6475.94 6416.26,6525.94 6523.21,6525.94 6558.56,6561.3 6558.56,6601.3 6629.28,6672.01 6669.28,6672.01 R30.1@6689.1,6691.83 ; 3.3V.1@6361.89,4980.94 3.3V.5@6459.7,5078.75 ; C22.2@6466.26,5370.94 6465.02,5372.18 C22.2@6465.02,5390.94 ; v1(6570.2,5338.62) 6570.2,5318.27 R5.2@6586.89,5301.57 ; v1(6572.52,6135.94) 6572.52,6010.94 ; R25.1@6586.89,5451.57 R25.1@6589.18,5461.66 ; R28.1@6588.47,5600.19 6628.47,5560.19 6628.47,5500.94 R25.1@6589.18,5461.66 ; C10.2@6601.26,5920.94 6572.52,5920.94 ; C42.1@6601.26,6010.94 6572.52,6010.94 ; C9.1@6726.21,4981.28 6725.28,4982.2 C86.1@6641.26,4982.2 C8.1@6556.26,4982.2 6410.2,5128.27 6240.2,5128.27 6210.2,5158.27 6210.2,5258.27 C87.1@6230.2,5278.27 ; JP2.30@6741.2,5796.69 6625.52,5796.69 R27.1@6586.26,5835.94 6572.52,5849.68 6572.52,5920.94 ; C90.1@3836.26,5677.2 C83.1@3836.26,5760.94 3879.39,5804.07 3897.32,5804.07 ; C19.2@3844.24,5932.96 3891.97,5885.23 3898.48,5885.23 ; 3897.32,5804.07 3897.32,5851.57 ; 3897.32,5851.57 3897.32,5884.07 3898.48,5885.23 ; 5501.26,6417.44 5536.62,6382.08 5536.62,6352.08 5596.89,6291.81 U3.7@5596.89,6201.96 ; 5909.39,5996.81 6156.66,5996.81 U11.3@6222.52,5930.94 6222.52,5910.94 6363.94,5769.52 6363.94,5489.52 ; C87.1@6212.52,5298.44 C24.2@6212.52,5370.94 6331.1,5489.52 6363.94,5489.52 ; C87.1@6212.52,5298.44 6212.52,5295.94 C87.1@6230.2,5278.27 ; 6363.94,5489.52 6462.52,5390.94 C22.2@6465.02,5390.94 ; C22.2@6465.02,5390.94 6482.52,5390.94 v1(6500.2,5408.62) 6553.23,5461.66 R25.1@6589.18,5461.66 ; 6572.52,5920.94 6572.52,6010.94
  Inner1 w9.92: v1(4294.67,5674.3) 4394.67,5674.3 4430.02,5709.66 4496.14,5709.66 4500.78,5714.3 4528.92,5714.3 4534.67,5714.3 ; v1(4528.92,5364.3) 4528.92,5404.3 4633.57,5508.95 4703.57,5508.95 4738.92,5544.3 4738.92,5554.3 ; v1(4534.67,5614.3) 4544.67,5624.3 4544.67,5704.3 4534.67,5714.3 ; v1(4914.21,6195.03) 4954.21,6235.03 v1(5004.21,6235.03) ; v1(5198.92,6034.3) 5078.92,5914.3 5048.92,5914.3 4915.7,5781.08 4915.7,5731.08 4738.92,5554.3 ; 4534.67,5714.3 4578.92,5714.3 4738.92,5554.3
  Inner1 w10: v1(5606.89,6146.81) 5626.89,6166.81 5796.89,6166.81 5866.89,6096.81 v1@5909.39,6096.81 ; v1(5909.39,6086.81) v1@5909.39,6096.81 ; C28.1@5967.99,6110.94 5953.85,6096.81 v1@5909.39,6096.81 ; v1(6292.52,6415.94) v1(6572.52,6135.94) ; 3.3V.3@6361.89,5180.94 3.3V.3@6362.24,5181.29 ; 3.3V.5@6461.89,5080.94 6362.24,5180.6 3.3V.3@6362.24,5181.29 ; v1(6570.2,5338.62) 6519.57,5338.62 3.3V.3@6362.24,5181.29
  Inner2 w9.92: v1(5004.21,6235.03) 5008.85,6230.38 5008.85,6200.38 5044.21,6165.03 5064.21,6165.03 5084.21,6185.03 v1(5084.21,6192.55) v1(5084.21,6252.55)
  Inner2 w10: v1(3704.24,6372.96) 3914.24,6162.96 v1(4054.24,6162.96) ; v1(6292.52,6415.94) 6322.52,6415.94 v1(6342.52,6435.94) ; v1(6500.2,5408.62) v1(6570.2,5338.62)
  Bottom Layer w9.92: v1(4534.67,5614.3) v1(4594.67,5554.3) ; v1(5074.53,5600.43) 5180.6,5706.5 5180.6,5726.5 v1(5254.53,5800.43)
  Bottom Layer w10: v1(3395.43,6710.94) 3415.43,6690.94 H2.54@3435.43,6690.94 3704.24,6422.14 v1(3704.24,6372.96) ; v1(3704.24,5872.96) 3724.24,5892.96 v1(3804.24,5892.96) 3804.24,5932.96 3981.02,6109.74 4001.02,6109.74 v1(4054.24,6162.96) ; v1(5790.15,5373.57) 5824.79,5338.93 5864.79,5338.93 5900.15,5303.57 v1(5910.15,5303.57)
$2N1190: 
$2N2371: LED1.1 R22.1 | length 119.1
  Top Layer w10: LED1.1@5823.24,6405.94 5857.52,6405.94 R22.1@5917.52,6345.94
$2N2397: LED2.1 R19.1 | length 2051.9
  Top Layer w10: v1(4233.24,5765.94) 4233.24,5786.66 R19.1@4257.52,5810.94 ; v1(4893.24,5855.94) 4953.24,5915.94 v1(4953.24,6055.94) ; v1(5783.24,6285.94) 5793.24,6275.94 LED2.1@5823.24,6275.94
  Inner2 w10: v1(5573.24,6355.94) 5643.24,6285.94 v1(5783.24,6285.94)
  Bottom Layer w10: v1(4233.24,5765.94) 4266.24,5732.95 4410.25,5732.95 4543.24,5865.94 4883.24,5865.94 v1(4893.24,5855.94) ; v1(4953.24,6055.94) 4985.75,6088.46 5325.75,6088.46 5573.24,6335.94 v1(5573.24,6355.94)
$2N2423: LED3.1 R21.1 | length 1825.2
  Top Layer w10: R21.1@4257.52,5905.94 4262.52,5910.94 v1(4293.24,5910.94) ; v1(5783.24,6130.94) LED3.1@5823.24,6130.94
  Inner1 w10: v1(4293.24,5910.94) 4313.24,5890.94 4633.24,5890.94 4723.24,5980.94 v1(4723.24,6030.94)
  Inner2 w10: v1(5023.24,6060.94) 5208.6,6246.3 5467.89,6246.3 5512.53,6201.66 5662.53,6201.66 5733.24,6130.94 v1(5783.24,6130.94)
  Bottom Layer w10: v1(4723.24,6030.94) 4853.24,6030.94 4883.24,6060.94 4903.24,6060.94 4933.24,6030.94 4983.24,6030.94 5013.24,6060.94 v1(5023.24,6060.94)
$2N2449: LED4.1 R20.1 | length 1933.6
  Top Layer w10: v1(4203.24,5755.94) 4238.24,5720.94 R20.1@4257.52,5720.94 ; v1(5773.24,6025.94) LED4.1@5823.24,5975.94
  Inner1 w10: v1(4803.24,5835.94) 4913.24,5945.94 v1(5053.24,5945.94)
  Inner2 w10: v1(4203.24,5755.94) 4223.24,5735.94 4243.24,5735.94 4263.24,5755.94 4263.24,5775.94 4317.89,5830.59 4487.89,5830.59 4523.24,5865.94 4773.24,5865.94 v1(4803.24,5835.94)
  Bottom Layer w10: v1(5053.24,5945.94) 5057.89,5941.3 5155.04,5941.3 5190.4,5905.94 5340.4,5905.94 5350.4,5915.94 5400.4,5915.94 5431.82,5884.52 5631.82,5884.52 v1(5773.24,6025.94)
$2N8015: C31.2 C32.1 D6.1 F1.1 Q1.2 | length 1397.6
  Top Layer w10: v1(3912.99,6270.94) 4020.9,6270.94 4024.44,6267.41 ; D6.1@3957.89,6475.94 4022.54,6411.3 4062.54,6411.3 4097.89,6375.94 4097.89,6307.41 4057.89,6267.41 4024.44,6267.41 ; F1.1@4056.45,6235.4 4024.44,6267.41 ; v1(4072.52,5813.54) 4092.52,5793.54 Q1.2@4112.52,5793.54 4112.52,5783.54 4202.52,5693.54 4202.52,5683.54 4212.52,5673.54 4212.52,5562.2 C31.2@4191.26,5540.94
  Inner1 w10: v1(3912.99,6270.94) 3947.64,6236.3 3947.64,6086.3 C32.1@3982.99,6050.94 4102.52,5931.41 4102.52,5843.54 v1(4072.52,5813.54)
$2N8071: F1.2 S1.3 | length 2813.4
  Top Layer w10: F1.2@4146.41,6235.4 4181.76,6270.76 4181.76,6380.76 v1(4206.41,6405.4) ; v1(4256.41,6595.4) 4556.41,6595.4 4591.76,6630.76 4841.76,6630.76 4886.41,6675.4 4886.41,6705.4 4916.41,6735.4 v1(5666.41,6735.4)
  Inner1 w10: v1(5666.41,6735.4) 5756.41,6735.4 5786.41,6705.4 5786.41,6675.4 5816.41,6645.4 6066.41,6645.4 6076.41,6655.4 6432.67,6655.4 S1.3@6501.26,6586.81
  Bottom Layer w10: v1(4206.41,6405.4) 4206.41,6545.4 v1(4256.41,6595.4)
$2N8642: R14.2 U5.2 | length 152.7
  Top Layer w10: U5.2@3527.39,5345.94 3537.39,5345.94 3572.75,5381.3 3572.75,5439.84 R14.2@3596.93,5464.02
$2N8662: D3.2 R11.1 | length 629
  Top Layer w10: D3.2@3310.54,5265.94 3360.54,5215.94 3612.52,5215.94 v1(3632.52,5235.94) ; v1(3802.52,5335.94) 3842.52,5375.94 R11.1@3852.52,5375.94
  Inner1 w10: v1(3632.52,5235.94) 3732.52,5335.94 v1(3802.52,5335.94)
$2N8666: D1.2 R8.1 | length 132.6
  Top Layer w10: R8.1@3451.26,6200.94 3555.54,6200.94 D1.2@3575.54,6220.94
$2N8697: R11.2 U5.7 | length 226.3
  Top Layer w10: U5.7@3756.39,5345.94 3766.39,5345.94 3801.75,5381.3 3801.75,5391.3 3826.39,5415.94 3891.26,5415.94 R11.2@3931.26,5375.94
$2N79826: C28.2 C29.1 | length 1118.9
  Top Layer w10: C29.1@5282.52,6491.48 v1(5332.52,6441.48)
  Inner1 w10: v1(5332.52,6441.48) 5482.52,6441.48 5522.52,6401.48 5602.52,6401.48 5622.52,6421.48 6002.52,6421.48 6105.79,6318.21 C28.2@6105.79,6110.94
AF2.8V: C49.2 C50.2 JP1.23 U12.2 | length 3507.3
  Top Layer w10: v1(4866.26,5283.34) 4896.26,5313.34 U12.2@4896.26,5323.34 ; v1(5636.26,5253.34) 5636.26,5233.34 5646.26,5223.34 5723.66,5223.34 C49.2@5755.48,5255.16 ; C49.2@5761.26,5260.94 C49.2@5755.48,5255.16 ; v1(5815.48,5215.16) 5775.48,5255.16 C49.2@5755.48,5255.16 ; C50.2@6001.26,6475.94 6032.04,6445.16 v1(6045.48,6445.16) ; v1(6595.48,6485.16) 6602.96,6492.64 JP1.23@6741.2,6492.64
  Inner1 w10: v1(5066.26,5153.34) 5536.26,5153.34 v1(5636.26,5253.34) ; v1(6005.48,5235.16) v1(6005.48,5345.16)
  Inner2 w10: v1(6005.48,5345.16) 6125.48,5465.16 6125.48,5515.16 6054.77,5585.88 6054.77,5715.88 v1(6005.48,5765.16) ; v1(6045.48,6445.16) 6080.84,6480.52 6590.84,6480.52 v1(6595.48,6485.16)
  Bottom Layer w10: v1(4866.26,5283.34) 4996.26,5283.34 5066.26,5213.34 v1(5066.26,5153.34) ; v1(5815.48,5215.16) 5845.48,5245.16 5995.48,5245.16 v1(6005.48,5235.16) ; v1(6005.48,5765.16) 6005.48,5915.16 6055.48,5965.16 6055.48,6435.16 v1(6045.48,6445.16)
AGND_C: JP1.2 L2.1 | length 264.2
  Top Layer w10: L2.1@6581.89,6253.98 6631.2,6204.67 v1(6631.2,6149.25) ; v1(6691.2,6089.25) 6701.2,6079.25 JP1.2@6741.2,6079.25
  Inner1 w10: v1(6631.2,6149.25) v1(6691.2,6089.25)
BOOT0: H2.53 R3.1 U1.138 | length 1617.9
  Top Layer w9.92: v1(4630.51,6420.52) 4660.51,6420.52 ; U1.138@4660.51,6341.14 4660.51,6420.52 ; R3.1@4767.52,6490.94 4763.08,6486.5 4745.87,6486.5 4710.51,6451.14 4680.51,6451.14 4660.51,6431.14 4660.51,6420.52
  Bottom Layer w9.92: H2.53@3435.43,6790.94 3485.86,6740.52 4250.51,6740.52 4280.51,6710.52 4280.51,6680.52 4505.16,6455.87 4595.16,6455.87 v1(4630.51,6420.52)
CC: R12.1 USB1.A5 USB1.B5 | length 2133.1
  Top Layer w10: USB1.B5@3296.97,6302.04 3328.86,6302.04 v1(3346.97,6320.15) ; USB1.A5@3296.97,6420.15 v1(3336.97,6420.15) 3336.97,6470.15 3436.97,6570.15 4736.97,6570.15 4746.97,6580.15 5063.31,6580.15 5098.67,6544.8 5098.67,6504.8 R12.1@5112.52,6490.94
  Bottom Layer w10: v1(3336.97,6420.15) 3336.97,6330.15 v1(3346.97,6320.15)
D+: R10.1 USB1.A6 USB1.B6 | length 2744
  Top Layer w10: v1(3252.6,6341.41) USB1.B6@3296.97,6341.41 3327.6,6341.41 3336.97,6350.78 3336.97,6370.78 3326.97,6380.78 USB1.A6@3296.97,6380.78 ; R10.1@5428.02,5963.53 5435.9,5971.41 v1(5462.6,5971.41)
  Bottom Layer w10: v1(3252.6,6341.41) 3622.6,5971.41 3772.6,5971.41 3992.6,6191.41 4322.6,6191.41 4532.6,5981.41 5282.6,5981.41 5302.6,5961.41 5452.6,5961.41 v1(5462.6,5971.41)
D-: R9.1 USB1.A7 USB1.B7 | length 2653.3
  Top Layer w10: v1(3253.44,6396.94) v1@3263.44,6396.94 ; USB1.A7@3296.97,6361.1 3266.34,6361.1 3256.97,6370.47 3256.97,6390.47 v1@3263.44,6396.94 ; USB1.B7@3296.97,6400.47 3266.97,6400.47 v1@3263.44,6396.94 ; v1(5553.44,6096.94) 5553.44,6085.03 R9.1@5582.52,6055.94
  Inner1 w10: v1(4843.44,6056.94) 4913.44,6056.94 4963.44,6106.94 5463.44,6106.94 5483.44,6126.94 5523.44,6126.94 v1(5553.44,6096.94)
  Inner2 w10: v1(3253.44,6396.94) 3453.44,6396.94 3753.44,6096.94 4453.44,6096.94 4483.44,6066.94 4833.44,6066.94 v1(4843.44,6056.94)
FLASH_CLK: H2.30 U1.133 U3.6 | length 1645.6
  Top Layer w9.92: v1(4748.94,6401.14) 4758.94,6391.14 U1.133@4758.94,6341.14 ; v1(4858.32,6538.06) v1(5028.32,6538.06) ; v1(5468.32,6378.06) 5468.32,6348.06 5538.32,6278.06 5538.32,6210.53 U3.6@5546.89,6201.96
  Inner1 w9.92: H2.30@4635.43,6690.94 4708.32,6618.06 ; v1(4718.32,6598.06) v1@4713.59,6602.79 ; v1(4748.94,6401.14) 4713.59,6436.5 v1@4713.59,6602.79 ; v1(5328.32,6408.06) 5438.32,6408.06 v1(5468.32,6378.06) ; 4708.32,6618.06 4708.32,6608.06 v1@4713.59,6602.79 ; 4708.32,6618.06 4713.59,6612.79 v1@4713.59,6602.79
  Inner2 w9.92: v1(5128.32,6588.06) 5128.32,6558.06 5163.68,6522.7 5213.68,6522.7 v1(5328.32,6408.06)
  Bottom Layer w9.92: v1(4718.32,6598.06) 4748.32,6628.06 4868.32,6628.06 4878.32,6618.06 4878.32,6558.06 v1(4858.32,6538.06) ; v1(5028.32,6538.06) 5028.32,6558.06 5058.32,6588.06 v1(5128.32,6588.06)
FLASH_CS: H1.14 U1.75 U3.1 | length 2241.1
  Top Layer w9.92: U1.75@5312.09,5610.82 5352.09,5610.82 5372.09,5590.82 5372.09,5560.82 v1(5362.09,5550.82) ; U3.1@5646.89,6479.92 5646.89,6276.02 5679.11,6243.81 v1(5679.11,6103.81)
  Inner1 w9.92: v1(5495.67,5749.59) 5554.88,5749.59 5665.17,5859.88 5725.17,5859.88 v1(5789.11,5923.81)
  Inner2 w9.92: v1(5359.11,5473.81) v1@5362.09,5470.82 ; v1(5362.09,5550.82) v1@5362.09,5470.82 ; v1(5429.11,5583.81) 5479.11,5583.81 5501.06,5605.77 5501.06,5715.16 5495.67,5720.55 v1(5495.67,5749.59) ; H1.14@5435.43,4980.94 5385.55,5030.82 5322.09,5030.82 5292.09,5060.82 5292.09,5320.82 5336.74,5365.47 5356.74,5365.47 5392.09,5400.82 5392.09,5410.82 5369.11,5433.81 ; v1(5679.11,6103.81) 5683.04,6099.88 5683.04,6029.88 v1(5789.11,5923.81) ; v1@5362.09,5470.82 5362.09,5440.82 5369.11,5433.81 ; v1@5362.09,5470.82 5369.11,5463.81 5369.11,5433.81
  Bottom Layer w9.92: v1(5359.11,5473.81) 5359.11,5523.81 5419.11,5583.81 v1(5429.11,5583.81)
FLASH_SI: H2.32 U1.135 U3.5 | length 1440.4
  Top Layer w9.92: v1(4709.57,6281.14) 4719.57,6291.14 U1.135@4719.57,6341.14 ; v1(5469.57,6271.14) 5469.57,6229.28 U3.5@5496.89,6201.96
  Inner1 w9.92: H2.32@4535.43,6690.94 4659.57,6566.81 4659.57,6331.14 v1(4709.57,6281.14)
  Inner2 w9.92: v1(5139.57,6221.14) 5159.57,6221.14 5209.57,6271.14 v1(5469.57,6271.14)
  Bottom Layer w9.92: v1(4709.57,6281.14) 4744.93,6245.79 4944.93,6245.79 4979.57,6211.14 5029.57,6211.14 5039.57,6221.14 v1(5139.57,6221.14)
FLASH_SO: H2.31 U1.134 U3.2 | length 1965.2
  Top Layer w9.92: U1.134@4739.25,6341.14 4739.25,6291.14 v1(4749.25,6281.14) ; v1(5032.24,6628.16) 5052.24,6648.16 5252.24,6648.16 v1(5272.24,6628.16) ; v1(5512.24,6538.16) 5558.66,6538.16 5594.01,6502.81 5594.01,6482.81 U3.2@5596.89,6479.92
  Inner1 w9.92: v1(5272.24,6628.16) 5292.24,6608.16 v1(5402.24,6608.16)
  Inner2 w9.92: H2.31@4535.43,6790.94 4579.25,6747.13 4579.25,6601.14 4719.25,6461.14 4719.25,6311.14 v1(4749.25,6281.14) 4777.59,6252.81 4966.88,6252.81 5012.24,6298.16 5012.24,6448.16 4992.24,6468.16 4992.24,6588.16 v1(5032.24,6628.16) ; v1(5402.24,6608.16) 5442.24,6608.16 v1(5512.24,6538.16)